# Altium PCB Copy of PCB2.PcbDoc
Units mil, origin at the board's own origin, x right, y up, seen from the top; angles counter-clockwise.
Board outline 6000 x 4000 mil, 2 copper layers (Top Layer, Bottom Layer); 109 components, 117 nets, 490 pads, 0 vias.
Unrouted connection lines stored in the file: 205.
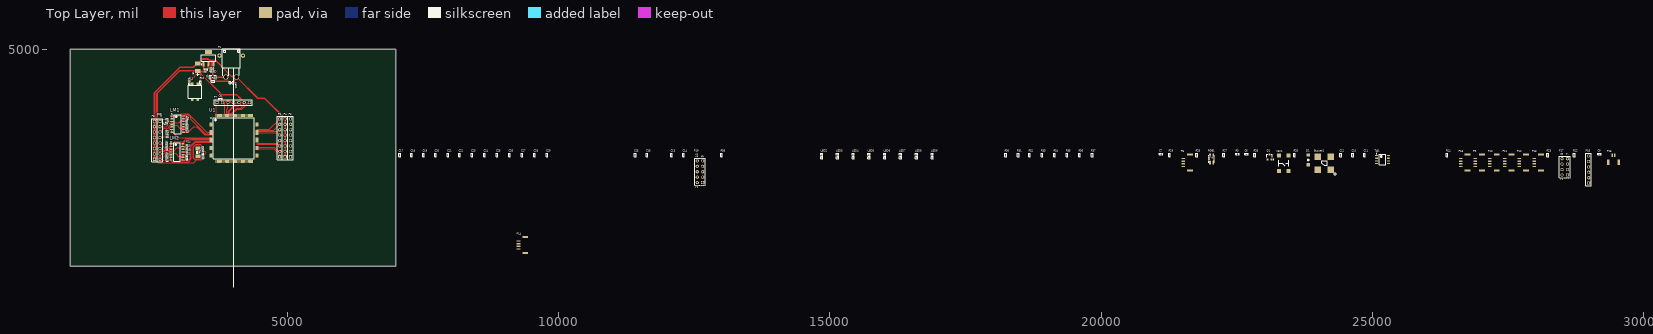
[diagram p0: Top Layer view]
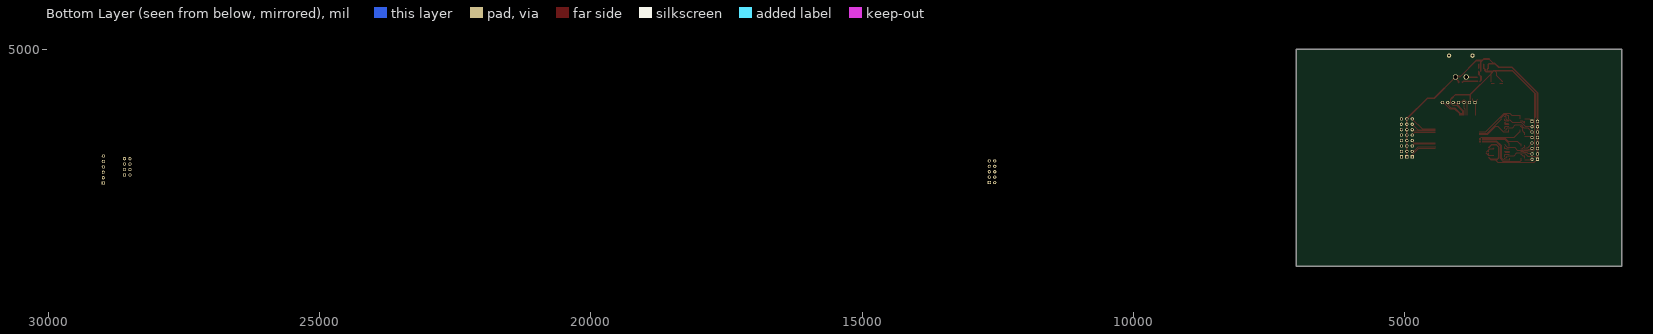
[diagram p1: Bottom Layer view, seen from below]

## Layer stack, top to bottom
Top Solder: solder mask 0.4, Solder Resist, Dk 3.5
Top Layer: signal copper 1.4
Dielectric 1: dielectric 12.6, FR-4, Dk 4.8
Bottom Layer: signal copper 1.4
Bottom Solder: solder mask 0.4, Solder Resist, Dk 3.5

## Board outline
1000,1000 7000,1000 7000,5000 1000,5000

## Design rules (kind name [scope] priority, off if disabled: settings)
Clearance [All] p1: gap=8 ignorepadtopadclearanceinfootprint=TRUE except(0: Arc-Hole Track-Hole SMDPad-Hole THPad-Hole Via-Hole Fill-Hole Poly-Hole Region-Hole Text-Hole)
ComponentClearance [All] p1: gap=0 collisioncheckmode=3 verticalgap=0 showdistances=FALSE
MinimumSolderMaskSliver [All] p1: minsoldermaskwidth=0
PolygonConnect [All] p1: connectstyle=Relief reliefconductorwidth=10 reliefentries=4 polygonreliefangle="90 Angle" airgapwidth=10
RoutingVias [All] p1: holewidth=11.81 width=19.68 viastyle="Through Hole" minholewidth=11.81 minwidth=11.81 maxholewidth=11.81 maxwidth=19.68
SilkToSilkClearance [All] p1: silktosilkclearance=0
SilkToSolderMaskClearance [IsPad] p1: minsilkscreentomaskgap=0 clearancetoexposedcopper=TRUE
SolderMaskExpansion [All] p1: expansion=4
Width [All] p1: maxlimit=100 minlimit=5 preferedwidth=10
26 further rules are at their usual default settings.

## Components (designator, comment, footprint, x,y, rotation, side; value= is the part's Value field where it differs from the comment)
Buzzer1 "Buzzer" BUZZER 23945,2730 r0 top
C1 "22PF" 0402 3445,3166.98 r90 top
C2 "22PF" 0402 3445,3016.98 r270 top
C3 "0.1uf" 0402 3499,4625 r180 top
C4 "0.1uf" 0402 3614,4645 r180 top
C5 "10uf" 0402 3614,4595 r180 top
C6 "1uf" 0402 22680,3065 r0 top
C7 "0.1uf" 0402 21105,3065 r0 top
C8 "0.1uf" 0402 3769,4080 r0 top
C9 "0.1uf" 0402 29185,3065 r0 top
C10 "30pf" 0402 24635,3050 r90 top
C11 "30pf" 0402 24855,3050 r90 top
C12 "10uf" 0402 24415,3050 r90 top
C13 "10uf" 0402 12080,3050 r90 top
C14 "104" 0402 12300,3050 r90 top
C15 "225" 0402 11410,3050 r90 top
C16 "225" 0402 11630,3050 r90 top
C17 "106" 0402 7070,3050 r90 top
C18 "104" 0402 7290,3050 r90 top
C19 "104" 0402 7510,3050 r90 top
C20 "104" 0402 7730,3050 r90 top
C21 "104" 0402 7960,3050 r90 top
C22 "104" 0402 8175,3050 r90 top
C23 "104" 0402 8405,3050 r90 top
C24 "104" 0402 8635,3050 r90 top
C25 "104" 0402 8865,3050 r90 top
C26 "104" 0402 9095,3050 r90 top
C27 "104" 0402 9325,3050 r90 top
C28 "104" 0402 9555,3050 r90 top
C29 "104" 0402 9785,3050 r90 top
D1 "DIODE" DIODE 23815,2870 r90 top
E1 "100uF/10V" 3528 3350,4600 r90 top
F1 "Fuse" 0805 3623.85,4483.15 r0 top
KEY1 "Key" 6*6*5轻触开关 23365,2895 r90 top
LED1 "green" 0603 3972.5,4385.06 r0 top
LED2 "red" 0603 14850,3030 r90 top
LED3 "red" 0603 15140,3030 r90 top
LED4 "red" 0603 15430,3030 r90 top
LED5 "red" 0603 15720,3030 r90 top
LED6 "green" 0603 16010,3030 r90 top
LED7 "green" 0603 16300,3030 r90 top
LED8 "green" 0603 16595,3030 r90 top
LED9 "green" 0603 16885,3030 r90 top
LM1 "LM324" LM324 2976.73,3618 r0 top
LM2 "LM324" LM324 2965,3105 r0 top
P1 "Header 2" XT30-PW-M 3963.46,4683.15 r0 top
P2 "Header 8" HDR1X8 4860,3015 r90 top
P3 "Header 8" HDR1X8 5060,3015 r90 top
P4 "Header 8" HDR1X8 4960,3015 r90 top
P5 "Header 4" GH1.25_4P 21590,2910 r90 top
P6 "Header 8" HDR1X8 2650,3670 r270 top
P7 "Header 7" HDR1X7 3705,4015 r0 top
P8 "Header 8" HDR1X8 2550,2970 r90 top
P9 "Header 4" GH1.25_4P 26975,2910 r90 top
P10 "Header 4" GH1.25_4P 27245,2910 r90 top
P11 "Header 4" GH1.25_4P 27515,2910 r90 top
P12 "Header 4" GH1.25_4P 27785,2910 r90 top
P13 "Header 4" GH1.25_4P 28060,2910 r90 top
P14 "Header 4" GH1.25_4P 9339.72,1388.82 r90 top
P15 "Header 2" GH1.25_2P 29345,2805 r0 top
P16 "Header 6" HDR1X6 28985,2530 r90 top
P17 "Header 4X2" HDR2X4 28595,2680 r90 top
P18 "Header 4" GH1.25_4P 26705,2910 r90 top
P19 "Header 5X2" HDR2X5 12655,2540 r90 top
Q1 "S8050" SOT-23R 23105,3010 r0 top
R1 "1M" 0402 3445.13,3091.98 r90 top
R2 "560R" 0402 3631,4410 r0 top
R3 "10K" 0402 22510,3065 r0 top
R4 "100K" 0402 3160,3731.58 r270 top
R5 "100K" 0402 3150.16,3658.06 r90 top
R6 "100K" 0402 2764,3630 r0 top
R7 "100K" 0402 2785,3689 r90 top
R8 "100K" 0402 3156,3583 r270 top
R9 "100K" 0402 2785.83,3476 r270 top
R10 "10K" 0402 3400,4384 r90 top
R11 "10K" 0402 3195,4380 r270 top
R12 "100K" 0402 2785,3404.9 r270 top
R13 "100K" 0402 3155,3511 r270 top
R14 "100K" 0402 3150.16,3216.12 r270 top
R15 "100K" 0402 3150,3142.12 r90 top
R16 "100K" 0402 2783.19,3251 r270 top
R17 "100K" 0402 2783.19,3179.81 r270 top
R18 "100K" 0402 3150,3071 r270 top
R19 "100K" 0402 2785,3044 r270 top
R20 "100K" 0402 2785,2970 r270 top
R21 "100K" 0402 3150,2996.12 r270 top
R22 "0R" 0402 28720,3050 r90 top
R23 "0R" 0402 28230,3050 r90 top
R24 "120R" 0402 26375,3050 r90 top
R25 "510R" 0402 23565,3050 r90 top
R26 "10K" 0402 22830,3050 r90 top
R27 "47R" 0402 22260,3050 r90 top
R28 "47R" 0402 21760,3050 r90 top
R29 "68R" 0402 21260,3050 r90 top
R30 "1K" 0402 18240,3050 r90 top
R31 "1K" 0402 18470,3050 r90 top
R32 "1K" 0402 18680,3050 r90 top
R33 "1K" 0402 18910,3050 r90 top
R34 "510R" 0402 19140,3050 r90 top
R35 "510R" 0402 19370,3050 r90 top
R36 "510R" 0402 19600,3050 r90 top
R37 "510R" 0402 19835,3050 r90 top
R38 "10R" 0402 13000,3050 r90 top
RGB1 "RGB" RGB_LED 22035,2975 r90 top
S1 "Switch" SWITCH_2P 3295,4214.02 r180 top
TJA1 "TJA1050" TJA1050 25185,2965 r0 top
U1 "STM32F407ZGT6" STM32F103ZETx 4015,3355 r0 top
U2 "AMS1117-3.3" ASM1117 3545,4835 r90 top
x1 "8MHz" 8M晶振 3355,3095.98 r270 top

## Footprints (in the part's own frame and the unit in brackets; to place one, negate y for a bottom-side part, rotate by r counter-clockwise, add the part's x,y. Pads: shape width x height; smd on the part's side, far side on the other; paste and mask are expansions set on the pad)
6*6*5轻触开关 [mm]
  rect 1.85x1.9 smd: 1(-3.675,2.25) 2(3.675,2.25) 3(-3.675,-2.25) 4(3.675,-2.25)
  silkscreen extent -1.35,-2.22 1.45,2.35
8M晶振 [mm]
  rect 1.7x2.4 smd: 1(-1.85,0) 2(1.85,0)
  silkscreen extent -0.72,-0.77 0.72,0.87, body extent -2.5,-1.6 2.5,1.6, height 0.25
0402 [mil]
  rect 20x23.62 smd: 1(-19,0) 2(19,0)
  silkscreen extent -33,-16 33,16
0603 [mil]
  rect 30x30 smd: 1(-27,0) 2(27.5,-0.06)
  silkscreen extent -48,-20 48,20
0805 [mil]
  rect 39.37x50 smd: 1(-36,0) 2(36,0)
  silkscreen extent -63,-33 64,33
3528 [mm]
  rect 1.9x2.5 smd: 1(0,0) 2(3.42,0)
  silkscreen extent -2.24,-0.56 -1.24,0.56
ASM1117 [mm] "SOT223, 4-Leads, Body 6.51x7.00mm (avg), Pitch 2.30mm, IPC Medium Density"
  rect 2.15x0.9 smd: 1(-2.93,2.3) 2(-2.93,0) 3(-2.93,-2.3)
  rect 2.15x3.25 smd: 4(2.93,0)
  silkscreen extent -3.05,-3.35 1.55,3.42, body extent -1.86,-3.35 1.86,3.35, height 1.8
BUZZER [mil]
  rect 118.11x118.11 smd: 1(290,45) 2(290,290) 3(45,290) 4(45,45)
  silkscreen extent 124,-65 400,216
DIODE [mm] "SODFL, 2-Leads, Body 3.63x5.35mm, IPC Medium Density"
  rect 1.52x1.724 smd: 1(0,0) 2(4.5,0)
  silkscreen extent 1.57,-0.5 2.86,0.52
GH1.25_2P [mm]
  rect 1x2.7 smd: 0(0,2.845) 0(4.95,2.845)
  rect 0.6x1.7 smd: 1(1.85,6.045) 2(3.1,6.045)
GH1.25_4P [mm]
  rect 1x2.7 smd: 0(-3.725,-1.175) 0(3.725,-1.175)
  rect 0.6x1.7 smd: 1(-1.875,2.025) 2(-0.625,2.025) 3(0.625,2.025) 4(1.875,2.025)
HDR1X6 [mm] "Connector; Header; 6 Position"
  rect 1.5x1.5 hole 0.9: 1(0,0)
  round 1.5 hole 0.9: 2(2.54,0) 3(5.08,0) 4(7.62,0) 5(10.16,0) 6(12.7,0)
  silkscreen extent -1.27,-1.27 13.97,1.27
HDR1X7 [mm] "Connector; Header; 7 Position"
  rect 1.5x1.5 hole 0.9: 1(0,0)
  round 1.5 hole 0.9: 2(2.54,0) 3(5.08,0) 4(7.62,0) 5(10.16,0) 6(12.7,0) 7(15.24,0)
  silkscreen extent -1.27,-1.27 16.51,1.27
HDR1X8 [mm] "Connector; Header; 8 Position"
  rect 1.5x1.5 hole 0.9: 1(0,0)
  round 1.5 hole 0.9: 2(2.54,0) 3(5.08,0) 4(7.62,0) 5(10.16,0) 6(12.7,0) 7(15.24,0) 8(17.78,0)
  silkscreen extent -1.27,-1.27 19.05,1.27
HDR2X4 [mm] "Connector; Header; 4x2 Position"
  rect 1.5x1.5 hole 0.9: 1(0,0)
  round 1.5 hole 0.9: 2(0,2.54) 3(2.54,0) 4(2.54,2.54) 5(5.08,0) 6(5.08,2.54) 7(7.62,0) 8(7.62,2.54)
  silkscreen extent -1.27,-1.27 8.89,3.81
HDR2X5 [mm] "Connector; Header; 5x2 Position"
  rect 1.5x1.5 hole 0.9: 1(0,0)
  round 1.5 hole 0.9: 2(0,2.54) 3(2.54,0) 4(2.54,2.54) 5(5.08,0) 6(5.08,2.54) 7(7.62,0) 8(7.62,2.54) 9(10.16,0) 10(10.16,2.54)
  silkscreen extent -1.27,-1.27 11.43,3.81
LM324 [mm] "SOIC, 14-Leads, Body 8.65x3.90mm, Pitch 1.27mm, IPC Medium Density"
  oval 1.45x0.6 smd: 1(-2.725,3.81) 2(-2.725,2.54) 3(-2.725,1.27) 4(-2.725,0) 5(-2.725,-1.27) 6(-2.725,-2.54) 7(-2.725,-3.81) 8(2.725,-3.81) 9(2.725,-2.54) 10(2.725,-1.27) 11(2.725,0) 12(2.725,1.27) 13(2.725,2.54) 14(2.725,3.81)
  silkscreen extent -2.85,-4.4 1.6,4.78, body extent -2,-4.4 2,4.4, height 1.75
RGB_LED [mm]
  rect 1.8x0.75 smd: 1(-1.7,-0.725) 2(-1.7,0.725) 3(1.7,-0.725) 4(1.7,0.725)
  silkscreen extent -1.8,-1.36 1.7,1.44
SOT-23R [mm] "SOT-23; 3 Leads; Body 3.0 x 2.5 mm, inc. leads (LxW max)"
  rect 0.9x0.95 smd: 1(0.95,-1.048) 2(-0.95,-1.048) 3(0,1.302)
  silkscreen extent -1.3,-1.19 1.93,1.3
STM32F103ZETx [mm] "TSQFP, 144-Leads, Body 20.00x20.00mm, Pitch 0.50mm, IPC Medium Density"
  oval 1.45x0.3 smd: 1(-10.725,8.75) 2(-10.725,8.25) 3(-10.725,7.75) 4(-10.725,7.25) 5(-10.725,6.75) 6(-10.725,6.25) 7(-10.725,5.75) 8(-10.725,5.25) 9(-10.725,4.75) 10(-10.725,4.25) 11(-10.725,3.75) 12(-10.725,3.25) 13(-10.725,2.75) 14(-10.725,2.25) 15(-10.725,1.75) 16(-10.725,1.25) 17(-10.725,0.75) 18(-10.725,0.25) 19(-10.725,-0.25) 20(-10.725,-0.75) 21(-10.725,-1.25) 22(-10.725,-1.75) 23(-10.725,-2.25) 24(-10.725,-2.75) 25(-10.725,-3.25) 26(-10.725,-3.75) 27(-10.725,-4.25) 28(-10.725,-4.75) 29(-10.725,-5.25) 30(-10.725,-5.75) 31(-10.725,-6.25) 32(-10.725,-6.75) 33(-10.725,-7.25) 34(-10.725,-7.75) 35(-10.725,-8.25) 36(-10.725,-8.75) 73(10.725,-8.75) 74(10.725,-8.25) 75(10.725,-7.75) 76(10.725,-7.25) 77(10.725,-6.75) 78(10.725,-6.25) 79(10.725,-5.75) 80(10.725,-5.25) 81(10.725,-4.75) 82(10.725,-4.25) 83(10.725,-3.75) 84(10.725,-3.25) 85(10.725,-2.75) 86(10.725,-2.25) 87(10.725,-1.75) 88(10.725,-1.25) 89(10.725,-0.75) 90(10.725,-0.25) 91(10.725,0.25) 92(10.725,0.75) 93(10.725,1.25) 94(10.725,1.75) 95(10.725,2.25) 96(10.725,2.75) 97(10.725,3.25) 98(10.725,3.75) 99(10.725,4.25) 100(10.725,4.75) 101(10.725,5.25) 102(10.725,5.75) 103(10.725,6.25) 104(10.725,6.75) 105(10.725,7.25) 106(10.725,7.75) 107(10.725,8.25) 108(10.725,8.75)
  oval 0.3x1.45 smd: 37(-8.75,-10.725) 38(-8.25,-10.725) 39(-7.75,-10.725) 40(-7.25,-10.725) 41(-6.75,-10.725) 42(-6.25,-10.725) 43(-5.75,-10.725) 44(-5.25,-10.725) 45(-4.75,-10.725) 46(-4.25,-10.725) 47(-3.75,-10.725) 48(-3.25,-10.725) 49(-2.75,-10.725) 50(-2.25,-10.725) 51(-1.75,-10.725) 52(-1.25,-10.725) 53(-0.75,-10.725) 54(-0.25,-10.725) 55(0.25,-10.725) 56(0.75,-10.725) 57(1.25,-10.725) 58(1.75,-10.725) 59(2.25,-10.725) 60(2.75,-10.725) 61(3.25,-10.725) 62(3.75,-10.725) 63(4.25,-10.725) 64(4.75,-10.725) 65(5.25,-10.725) 66(5.75,-10.725) 67(6.25,-10.725) 68(6.75,-10.725) 69(7.25,-10.725) 70(7.75,-10.725) 71(8.25,-10.725) 72(8.75,-10.725) 109(8.75,10.725) 110(8.25,10.725) 111(7.75,10.725) 112(7.25,10.725) 113(6.75,10.725) 114(6.25,10.725) 115(5.75,10.725) 116(5.25,10.725) 117(4.75,10.725) 118(4.25,10.725) 119(3.75,10.725) 120(3.25,10.725) 121(2.75,10.725) 122(2.25,10.725) 123(1.75,10.725) 124(1.25,10.725) 125(0.75,10.725) 126(0.25,10.725) 127(-0.25,10.725) 128(-0.75,10.725) 129(-1.25,10.725) 130(-1.75,10.725) 131(-2.25,10.725) 132(-2.75,10.725) 133(-3.25,10.725) 134(-3.75,10.725) 135(-4.25,10.725) 136(-4.75,10.725) 137(-5.25,10.725) 138(-5.75,10.725) 139(-6.25,10.725) 140(-6.75,10.725) 141(-7.25,10.725) 142(-7.75,10.725) 143(-8.25,10.725) 144(-8.75,10.725)
  silkscreen extent -10.85,-9.6 9.6,9.6, body extent -10,-10 10,10, height 1.6
SWITCH_2P [mm]
  rect 1.1x1.1 smd: 1(-1.27,3.835) 2(-1.27,-3.835) 3(1.27,3.835) 4(1.27,-3.835)
  silkscreen extent -3.2,-3.03 3.2,3.03
TJA1050 [mm] "SOIC, 8-Leads, Body 4.90x3.90mm, Pitch 1.27mm, IPC Medium Density"
  oval 1.45x0.6 smd: 1(-2.725,1.905) 2(-2.725,0.635) 3(-2.725,-0.635) 4(-2.725,-1.905) 5(2.725,-1.905) 6(2.725,-0.635) 7(2.725,0.635) 8(2.725,1.905)
  silkscreen extent -2.85,-2.4 1.6,2.88, body extent -2,-2.4 2,2.4, height 1.75
XT30-PW-M [mm]
  round 2 hole 1: 0(-5.5,5) 0(5.5,5)
  round 2.5 hole 1.7: 1(-2.5,-5) 2(2.5,-5)
  silkscreen extent -4.22,-4.34 4.19,8.13

## Part data
C1 C2 C3 C4 C5 C6 C7 C8 C9 C10 C11 C12 C13 C14 C15 C16 C17 C18 C19 C20 C21 C22 C23 C24 C25 C26 C27 C28 C29: library part C
E1: library part C-CM, "钽电容", BOM名称=贴片电解电容, 学习资源=www.ooocke.com, 版权归属=源创客
LED1 LED2 LED3 LED4 LED5 LED6 LED7 LED8 LED9: library part LED
P1 P15: "Header, 2-Pin", LatestRevisionDate=17-Jul-2002, LatestRevisionNote="Re-released for DXP Platform.", Publisher="Altium Limited"
P2 P3 P4 P6 P8: "Header, 8-Pin", LatestRevisionDate=17-Jul-2002, LatestRevisionNote="Re-released for DXP Platform.", Publisher="Altium Limited"
P5 P9 P10 P11 P12 P13 P14 P18: "Header, 4-Pin", LatestRevisionDate=17-Jul-2002, LatestRevisionNote="Re-released for DXP Platform.", Publisher="Altium Limited"
P7: "Header, 7-Pin", LatestRevisionDate=17-Jul-2002, LatestRevisionNote="Re-released for DXP Platform.", Publisher="Altium Limited"
P16: "Header, 6-Pin", LatestRevisionDate=17-Jul-2002, LatestRevisionNote="Re-released for DXP Platform.", Publisher="Altium Limited"
P17: "Header, 4-Pin, Dual row", LatestRevisionDate=17-Jul-2002, LatestRevisionNote="Re-released for DXP Platform.", Publisher="Altium Limited"
P19: "Header, 5-Pin, Dual row", LatestRevisionDate=17-Jul-2002, LatestRevisionNote="Re-released for DXP Platform.", Publisher="Altium Limited"
Q1: library part NPN, "8050/BCW846/BCW847"
R1 R2 R3 R4 R5 R6 R7 R8 R9 R10 R11 R12 R13 R14 R15 R16 R17 R18 R19 R20 R21 R22 R23 R24 R25 R26 R27 R28 R29 R30 R31 R32 R33 R34 R35 R36 R37 R38: library part R
x1: library part XTAL_8MHz

## Nets (pads, with @x,y where several pads share a name; then routed paths per layer and width w, separated by ;. In a path a pad name is that pad's centre, name@x,y a point inside that pad or via, vN(x,y) a via of type N, cw(c..) or ccw(c..) an arc to the next point about the centre after c; other vN are vias at no path point)
ADC3_4: LM1.6 LM1.7 U1.18 | length 816.5
  Top Layer w10: LM1.7 LM1.7@2869.45,3469.14 ; LM1.6 LM1.7@2869.45,3469.14 ; U1.18 2989.34,3364.84 2885.04,3469.14 LM1.7@2869.45,3469.14
ADC3_5: LM2.1 LM2.2 U1.19 | length 820.5
  Top Layer w10: LM2.2@2852.72,3208.94 2852.72,3250 2869.45,3250 2914.45,3295 3085,3295 3135.16,3345.16 U1.19@3565.51,3345.16 ; U1.19@3592.76,3345.32 U1.19@3620,3345.32
ADC3_6: LM2.13 LM2.14 U1.20 | length 597.8
  Top Layer w10: LM2.13@3067.28,3208.94 3067.28,3250 LM2.14 3142.76,3325.47 U1.20@3565.51,3325.47 ; U1.20@3592.76,3325.63 U1.20@3620,3325.63
ADC3_7: LM2.8 LM2.9 U1.21 | length 847.5
  Top Layer w10: LM2.8@3064.57,2950 3064.57,2991.06 ; LM2.8@3067.28,2950 3173,2950 3212,2989 3212,3217 3300.79,3305.79 U1.21@3565.51,3305.79 ; U1.21@3592.76,3305.94 U1.21@3620,3305.94
ADC3_8: LM2.6 LM2.7 U1.22 | length 1080.4
  Top Layer w10: LM2.7@2850,2950 2850,2993.18 ; LM2.7@2852.72,2950 2877.53,2925.19 3180.19,2925.19 3230,2975 3230,3209.54 3306.56,3286.1 U1.22@3565.51,3286.1 ; U1.22@3592.76,3286.26 U1.22@3620,3286.26
ADC3_9: LM1.1 LM1.2 U1.13 | length 963
  Top Layer w10: LM1.2@2864.45,3718 2864.45,3768 LM1.1 3014.82,3768 3052.55,3805.73 3170.51,3805.73 3512.81,3463.43 3592.76,3463.43 U1.13@3620,3463.43
ADC3_14: LM1.13 LM1.14 U1.14 | length 755.3
  Top Layer w10: LM1.13@3079.02,3718 3079.02,3768 LM1.14 3100.75,3768 3120.47,3787.73 3163.05,3787.73 3215.24,3735.53 3215.24,3712.16 3483.66,3443.74 U1.14@3620,3443.74
ADC3_15: LM1.8 LM1.9 U1.15 | length 689.7
  Top Layer w10: LM1.9@3079.02,3518 3079.02,3468 LM1.8 3175.09,3468 3272.24,3565.16 3332.24,3565.16 3473.35,3424.06 U1.15@3620,3424.06
ADC_CH1: P6.1 R7.2 | length 152.4
  Top Layer w10: P6.1 2690,3710 2770,3710 2772,3708 R7.2
ADC_CH2: P6.2 R4.1 | length 629.1
  Top Layer w10: P6.2 2769.63,3570 2842.82,3643.19 3007.38,3643.19 3057.01,3692.81 3110.65,3692.81 3125.56,3707.72 3125.56,3756.24 3139.05,3769.73 3158.19,3750.58 R4.1
ADC_CH3: P6.3 R13.2 | length 602.9
  Top Layer w10: P6.3 2723.19,3543.19 2792.82,3543.19 2842.44,3592.81 2968.01,3592.81 3017.63,3543.19 3110.65,3543.19 3125.56,3528.28 3125.56,3519.25 3137.8,3507 3138.19,3507 3153.19,3492 R13.2
ADC_CH4: P6.4 R12.2 | length 141.6
  Top Layer w10: P6.4 2663.27,3370 2679.17,3385.9 R12.2
ADC_CH5: P6.5 R17.2 | length 187
  Top Layer w10: P6.5@2650,3261.43 P6.5 2744.19,3175.81 2766.38,3175.81 2781.38,3160.81 R17.2
ADC_CH6: P6.6 R14.1 | length 563.8
  Top Layer w10: P6.6 2670,3150 2720,3150 2732.19,3137.81 2823.09,3137.81 2830.71,3130.19 2911.57,3130.19 2961.19,3179.81 3098.91,3179.81 3115.94,3196.83 3115.94,3203.09 3132.96,3220.12 3133.35,3220.12 3148.35,3235.12 R14.1
ADC_CH7: P6.7 R21.2 | length 559.5
  Top Layer w10: P6.7 2724.74,3070 2740.74,3086 2802.2,3086 2808.2,3080 2942.05,3080 2992.05,3030 3099.1,3030 3116.05,3013.06 3116.05,3008.87 3132.8,2992.12 3144.14,2992.12 3150,2986.26 R21.2
ADC_CH8: P6.8 R20.2 | length 142.9
  Top Layer w10: P6.8 2663.27,2970 2682.27,2951 R20.2
BOOT0: R10.1 S1.2 U1.138 | length 55
  Top Layer w10: S1.2 R10.1
BOOT1: R11.2 S1.4 U1.48 | length 51.7
  Top Layer w10: R11.2 3241,4361 S1.4
Buzzer: R25.1 U1.139
CAN_RX: TJA1.4 U1.103
CAN_TX: TJA1.1 U1.104
CANH: C10.2 P15.2 R22.2 R24.2
CANL: C11.2 P15.1 R23.2 R24.1
CE: P17.3 U1.70
CS: P7.7 U1.128 | length 435.4
  Top Layer w10: U1.128 3985.82,3777.59 3985.82,3807.28 4073.54,3895 4160,3895 4275.33,4010.33 4300.33,4010.33 P7.7
CSN: P17.4 U1.73
DC: P7.6 U1.129 | length 378.8
  Top Layer w10: U1.129 3966.13,3777.59 3966.13,3813.05 4066.08,3913 4137.69,3913 4205,3980.31 P7.6
EXIT_0: P19.1 U1.46
EXIT_1: P19.3 U1.47
EXIT_7: P19.5 U1.58
EXIT_8: P19.7 U1.59
EXIT_9: P19.9 U1.60
EXIT_10: P19.10 U1.63
EXIT_11: P19.8 U1.64
EXIT_12: P19.6 U1.65
EXIT_13: P19.4 U1.66
EXIT_14: P19.2 U1.67
GLED_1: R34.2 U1.92
GLED_2: R35.2 U1.91
GLED_3: R36.2 U1.90
GLED_4: R37.2 U1.89
GND: C1.2 C2.2 C3.2 C4.2 C5.2 C6.2 C7.1 C8.1 C9.2 C10.1 C11.1 C12.1 C13.1 C14.1 C15.1 C16.1 C17.1 C18.1 C19.1 C20.1 C21.1 C22.1 C23.1 C24.1 C25.1 C26.1 C27.1 C28.1 C29.1 E1.2 KEY1.1 KEY1.2 LED1.2 LED2.2 LED3.2 LED4.2 LED5.2 LED6.2 LED7.2 LED8.2 LED9.2 LM1.11 LM2.11 P1.2 P4.1 P4.2 P4.3 P4.4 P4.5 P4.6 P4.7 P4.8 P5.3 P7.1 P8.1 P8.2 P8.3 P8.4 P8.5 P8.6 P8.7 P8.8 P9.4 P10.4 P11.4 P12.4 P13.4 P14.4 P16.6 P17.1 P18.4 Q1.1 R5.1 R6.1 R8.1 R9.1 R15.1 R16.1 R18.1 R19.1 R26.1 S1.1 S1.3 TJA1.3 TJA1.8 U1.16 U1.31 U1.38 U1.51 U1.61 U1.83 U1.94 U1.107 U1.120 U1.130 U1.143 U2.1 | length 8008.7
  Top Layer w10: 3656.97,4063.03 P7.1 ; U1.143 3690.2,4000.2 P7.1 ; C8.1 3745,4075 3745,4055 P7.1 ; U1.130 3946.45,3777.59 3946.45,3818.82
  Top Layer w20: R19.1 2768,3063 2722.81,3017.81 2597.81,3017.81 P8.1 2617.81,2902.19 3270.51,2902.19 3335,2966.68 ; LM1.11 3101.73,3618 3117.73,3602 R8.1
  Top Layer w30: P8.1 P8.2 P8.3 P8.4 P8.5 P8.6 P8.7 P8.8 2550,4193.74 3020.25,4663.99 3267.54,4663.99 3338.19,4734.65 E1.2 ; LM2.11 3148.44,3105 3150,3106.56 ; LM1.11 3087.2,3621.19 3132.28,3621.19 R5.1 ; C2.2 3427,2979.97 3425.07,2979.97 3411.77,2966.68 3335,2966.68 3298.23,2966.68 3265,2999.91 3265,3196.99 3304.99,3236.98 3400.06,3236.98 3427.61,3209.44 3427.61,3207.79 3445,3190.4 C1.2 ; C3.2 3457.17,4647.83 3457.17,4716.93 U2.1 3454.45,4724.43 3451.73,4727.15 3357.5,4727.15 E1.2 ; C5.2 C4.2 3594.83,4645.17 3594.83,4762.38 3567.21,4790 ; LED1.2 4007.91,4392.91 4007.91,4409.11 4063.43,4464.63 4063.43,4483.15 4050.33,4496.24 3971.82,4496.24 3678.06,4790 3567.21,4790 ; P1.2 4451.31,4096.88 4578.12,4096.88 P4.8 P4.7 P4.6 P4.5 P4.4 P4.3 P4.2 P4.1 ; E1.2 3361.81,4734.65 3444.74,4817.57 3539.64,4817.57 3567.21,4790
I2C1_SCL: P14.2 U1.136
I2C1_SDA: P14.3 U1.137
I2C2_SCL: P18.2 U1.11
I2C2_SDA: P18.3 U1.10
IRQ: P17.8 U1.69
NetBuzzer1_2: Buzzer1.2 D1.2 Q1.3
NetC4_1: C4.1 C5.1 F1.1 R2.1 U2.3 | length 289.4
  Top Layer w30: R2.1 3592.54,4429.46 3592.54,4478.46 F1.1 3587.85,4488.46 3630,4530.61 3630,4576.26 3633,4579.26 C5.1 ; C4.1 3633,4717.09 U2.3
NetC15_2: C15.2 U1.106
NetC16_2: C16.2 U1.71
NetLED1_1: LED1.1 R2.2 | length 293.8
  Top Layer w30: R2.2 3915.56,4410 LED1.1@3935.5,4390.06
NetLED2_1: LED2.1 R30.1
NetLED3_1: LED3.1 R31.1
NetLED4_1: LED4.1 R32.1
NetLED5_1: LED5.1 R33.1
NetLED6_1: LED6.1 R34.1
NetLED7_1: LED7.1 R35.1
NetLED8_1: LED8.1 R36.1
NetLED9_1: LED9.1 R37.1
NetLM1_3: LM1.3 R6.2 R7.1 | length 133.4
  Top Layer w10: R7.1 2785,3634.81 2786.81,3634.81 2820,3668 LM1.3
NetLM1_5: LM1.5 R9.2 R12.1 | length 200.1
  Top Layer w10: R12.1 2785,3449.17 2797.83,3462 ; R9.2 2787.64,3457 2802.64,3472 2803.02,3472 2826.57,3495.54 2826.57,3541.85 2852.72,3568 LM1.5
NetLM1_10: LM1.10 R8.2 R13.1 | length 107.1
  Top Layer w10: LM1.10 3086.02,3566 3153,3566 3155.5,3563.5 3155.5,3530.5 R13.1
NetLM1_12: LM1.12 R4.2 R5.2 | length 105.7
  Top Layer w10: LM1.12 3139.28,3668 3148.35,3677.06 R5.2 R4.2@3150.16,3712 ; R4.2@3159.42,3713.17 R4.2
NetLM2_3: LM2.3 R16.2 R17.1 | length 126.1
  Top Layer w10: R17.1 R17.1@2785,3198.81 ; R17.1@2785,3195 R17.1@2785,3198.81 ; R16.2@2785,3228.38 R17.1@2785,3198.81 ; LM2.3 2840.98,3155 2812.17,3183.81 2800,3183.81 R17.1@2785,3198.81
NetLM2_5: LM2.5 R19.2 R20.1 | length 121.1
  Top Layer w10: R20.1 R19.2 2785.83,3025.83 2811.81,3025.83 2840.98,3055 LM2.5
NetLM2_10: LM2.10 R18.2 R21.1 | length 115.8
  Top Layer w10: LM2.10 3073.78,3053.5 3148.5,3053.5 R18.2 R21.1
NetLM2_12: LM2.12 R14.2 R15.2 | length 116.3
  Top Layer w10: LM2.12 3117.07,3155 3123.19,3161.12 R15.2 3150.08,3161.2 3150.08,3197.04 R14.2
NetQ1_2: Q1.2 R25.2 R26.2
NetR22_1: R22.1 TJA1.7
NetR23_1: R23.1 TJA1.6
NetR27_2: R27.2 RGB1.4
NetR28_1: R28.1 RGB1.2
NetR29_2: R29.2 RGB1.3
NRST: C6.1 KEY1.3 KEY1.4 R3.1 U1.25
OSC_IN: C1.1 R1.2 U1.23 x1.1 | length 230.4
  Top Layer w10: x1.1 3364.83,3158.98 3433.99,3158.98 C1.1 ; x1.1@3360.33,3174.15 x1.1@3373.67,3160.81 ; R1.2@3449.24,3106.87 R1.2 R1.2 3445.07,3147.91 C1.1 ; 3494.56,3100.23 3445.91,3148.88 C1.1
OSC_OUT: C2.1 R1.1 U1.24 x1.2 | length 207.6
  Top Layer w10: x1.2@3355,3035.98 C2.1 C2.1@3445.07,3036.04 ; 3456.14,3083.98 R1.1 3445.07,3072.91 C2.1@3445.07,3036.04 ; 3491.38,3080.54 3457.82,3046.98 3456.01,3046.98 C2.1@3445.07,3036.04 ; U1.24@3597.62,3246.87 U1.24@3597.76,3246.73
RES: P7.5 U1.132 | length 343.2
  Top Layer w10: U1.132 3906.73,3856.59 4060.47,4010.33 4100.33,4010.33 P7.5
RLED_1: R30.2 U1.1
RLED_2: R31.2 U1.2
RLED_3: R32.2 U1.3
RLED_4: R33.2 U1.4
SPI1_MISO: P16.3 U1.42
SPI1_MOSI: P16.2 U1.43
SPI1_NSS: P16.5 U1.40
SPI1_SCK: P16.4 U1.41
SPI2_MISO: P17.7 U1.75
SPI2_MOSI: P17.6 U1.76
SPI2_SCK: P17.5 U1.74
SPI3_CLK: P7.3 U1.133 | length 245.2
  Top Layer w10: U1.133 3887.05,3892.07 3905,3910.03 P7.3
SPI3_MOSI: P7.4 U1.135 | length 432
  Top Layer w10: U1.135 3847.68,4017.82 3887.38,4057.53 3922.62,4057.53 3960.47,4019.67 4000.33,4019.67 P7.4
SWCLK: P5.1 U1.109
SWDIO: P5.2 U1.105
TIM3_CH1: P2.5 U1.96 | length 451.5
  Top Layer w10: U1.96 4826.73,3463.27 4860,3430 P2.5
TIM3_CH2: P2.6 U1.97 | length 436
  Top Layer w10: U1.97 4827.95,3482.95 4847.5,3502.5 P2.6
TIM3_CH3: P2.7 U1.98 | length 469.3
  Top Layer w10: U1.98 4747.64,3502.64 4847.5,3602.5 P2.7
TIM3_CH4: P2.8 U1.99 | length 502.6
  Top Layer w10: U1.99 4667.32,3522.32 4847.5,3702.5 P2.8
TIM4_CH1: P2.1 U1.81 | length 509.5
  Top Layer w10: U1.81 4746.86,3167.99 4860,3054.86 P2.1
TIM4_CH2: P2.2 U1.82 | length 460.4
  Top Layer w10: U1.82@4430.78,3187.68 U1.82 4450,3187.68 4755.63,3187.68 4828.31,3115 P2.2 ; U1.82@4450,3188.46 U1.82@4450.78,3187.68
TIM4_CH3: P2.3 U1.85 | length 435.9
  Top Layer w10: U1.85 4828.27,3246.73 P2.3
TIM4_CH4: P2.4 U1.86 | length 451.7
  Top Layer w10: U1.86 4826.42,3266.42 4860,3300 P2.4
TIM5_CH1_R: R29.1 U1.34
TIM5_CH2_G: R27.1 U1.35
TIM5_CH3_B: R28.2 U1.36
UART4_RX: P9.2 U1.112
UART4_TX: P9.3 U1.111
UART5_RX: P12.2 U1.116
UART5_TX: P12.3 U1.113
USART1_RX: P10.2 U1.102
USART1_TX: P10.3 U1.101
USART2_RX: P11.2 U1.122
USART2_TX: P11.3 U1.119
USART3_RX: P13.2 U1.78
USART3_TX: P13.3 U1.77
VCC: Buzzer1.1 C3.1 C7.2 C8.2 C9.1 C12.2 C17.2 C18.2 C19.2 C20.2 C21.2 C22.2 C23.2 C24.2 C25.2 C26.2 C27.2 C28.2 C29.2 D1.1 E1.1 LM1.4 LM2.4 P3.1 P3.2 P3.3 P3.4 P3.5 P3.6 P3.7 P3.8 P5.4 P7.2 P9.1 P10.1 P11.1 P12.1 P13.1 P14.1 P16.1 P17.2 P18.1 R3.2 R10.2 R11.1 R38.1 RGB1.1 TJA1.2 U1.17 U1.30 U1.39 U1.52 U1.62 U1.72 U1.84 U1.95 U1.108 U1.121 U1.131 U1.144 U2.2 | length 4533.8
  Top Layer w10: R11.1 3196.81,4399 3201.81,4404 3201.81,4405.81 3305.79,4509.79 3305.79,4567.6 3338.19,4600 E1.1 ; E1.1@3384.21,4565.79 3400,4550 R10.2 ; C8.2 3788,4045.27 3805,4028.27 P7.2 ; U1.131 3926.76,3777.59 3926.76,3851.16 4018.26,3942.66 4032.8,3957.2 4107.34,3957.2 4147.53,3997.38 4147.53,4077.47 4140,4085
  Top Layer w20: 2597.47,3747.47 2597.53,3747.42 2597.53,3152.47 2632.47,3117.53 2676.21,3117.53 2678.93,3114.81 2805.91,3114.81 2815.03,3105.69 2857.02,3105.69 LM2.4
  Top Layer w30: 2597.47,3747.47 2597.47,4187.47 3010,4600 E1.1@3338.19,4600 ; E1.1 3361.81,4600 E1.1@3374.81,4587 ; E1.1@3384.21,4565.79 3384.21,4577.6 E1.1@3374.81,4587 ; 3400,4550 3788,4162 ; U2.2 3542.28,4716.93 3542.28,4649.28 C3.1 3518,4604.57 3500.43,4587 E1.1@3374.81,4587 ; C8.2 3788,4162 ; 4140,4085 4063,4162 3788,4162
VCC_IN: F1.2 P1.1 | length 206.7
  Top Layer w30: F1.2 P1.1@3866.57,4483.15
VDDA: C13.2 C14.2 R38.2 U1.32 U1.33
pads on no net: Buzzer1.3 Buzzer1.4 P1.0 P5.0 P9.0 P10.0 P11.0 P12.0 P13.0 P14.0 P15.0 P18.0 TJA1.5 U1.5 U1.6 U1.7 U1.8 U1.9 U1.12 U1.26 U1.27 U1.28 U1.29 U1.37 U1.44 U1.45 U1.49 U1.50 U1.53 U1.54 U1.55 U1.56 U1.57 U1.68 U1.79 U1.80 U1.87 U1.88 U1.93 U1.100 U1.110 U1.114 U1.115 U1.117 U1.118 U1.123 U1.124 U1.125 U1.126 U1.127 U1.134 U1.140 U1.141 U1.142 U2.4

## Silkscreen, mask and mechanical layers (free items; w line width, h text height)
Top Overlay:
  lines w10: 4015,615 4015,4610

## Text inside footprints (layer, text, board x,y; h text height)
P17: Top Overlay "2" at 28515,2580 h50 r90; Top Overlay "1" at 28615,2600 h50 r90; Top Overlay "7" at 28615,3040 h50 r90; Top Overlay "8" at 28515,3040 h50 r90
P19: Top Overlay "10" at 12575,3000 h50 r90; Top Overlay "9" at 12675,3000 h50 r90; Top Overlay "1" at 12675,2460 h50 r90; Top Overlay "2" at 12575,2440 h50 r90
RGB1: Top Overlay "B" at 22013.54,2953.07 h19.68 r90; Top Overlay "G" at 22013.54,2983.07 h19.68 r90; Top Overlay "R" at 22073.54,2983.07 h19.68 r90